# Altium PCB J1850_Tacho.PcbDoc
Units mm, origin at the board's own origin, x right, y up, seen from the top; angles counter-clockwise.
Board outline 100 x 100 mm, 2 copper layers (Top Layer, Bottom Layer); 54 components, 77 nets, 230 pads, 70 vias.
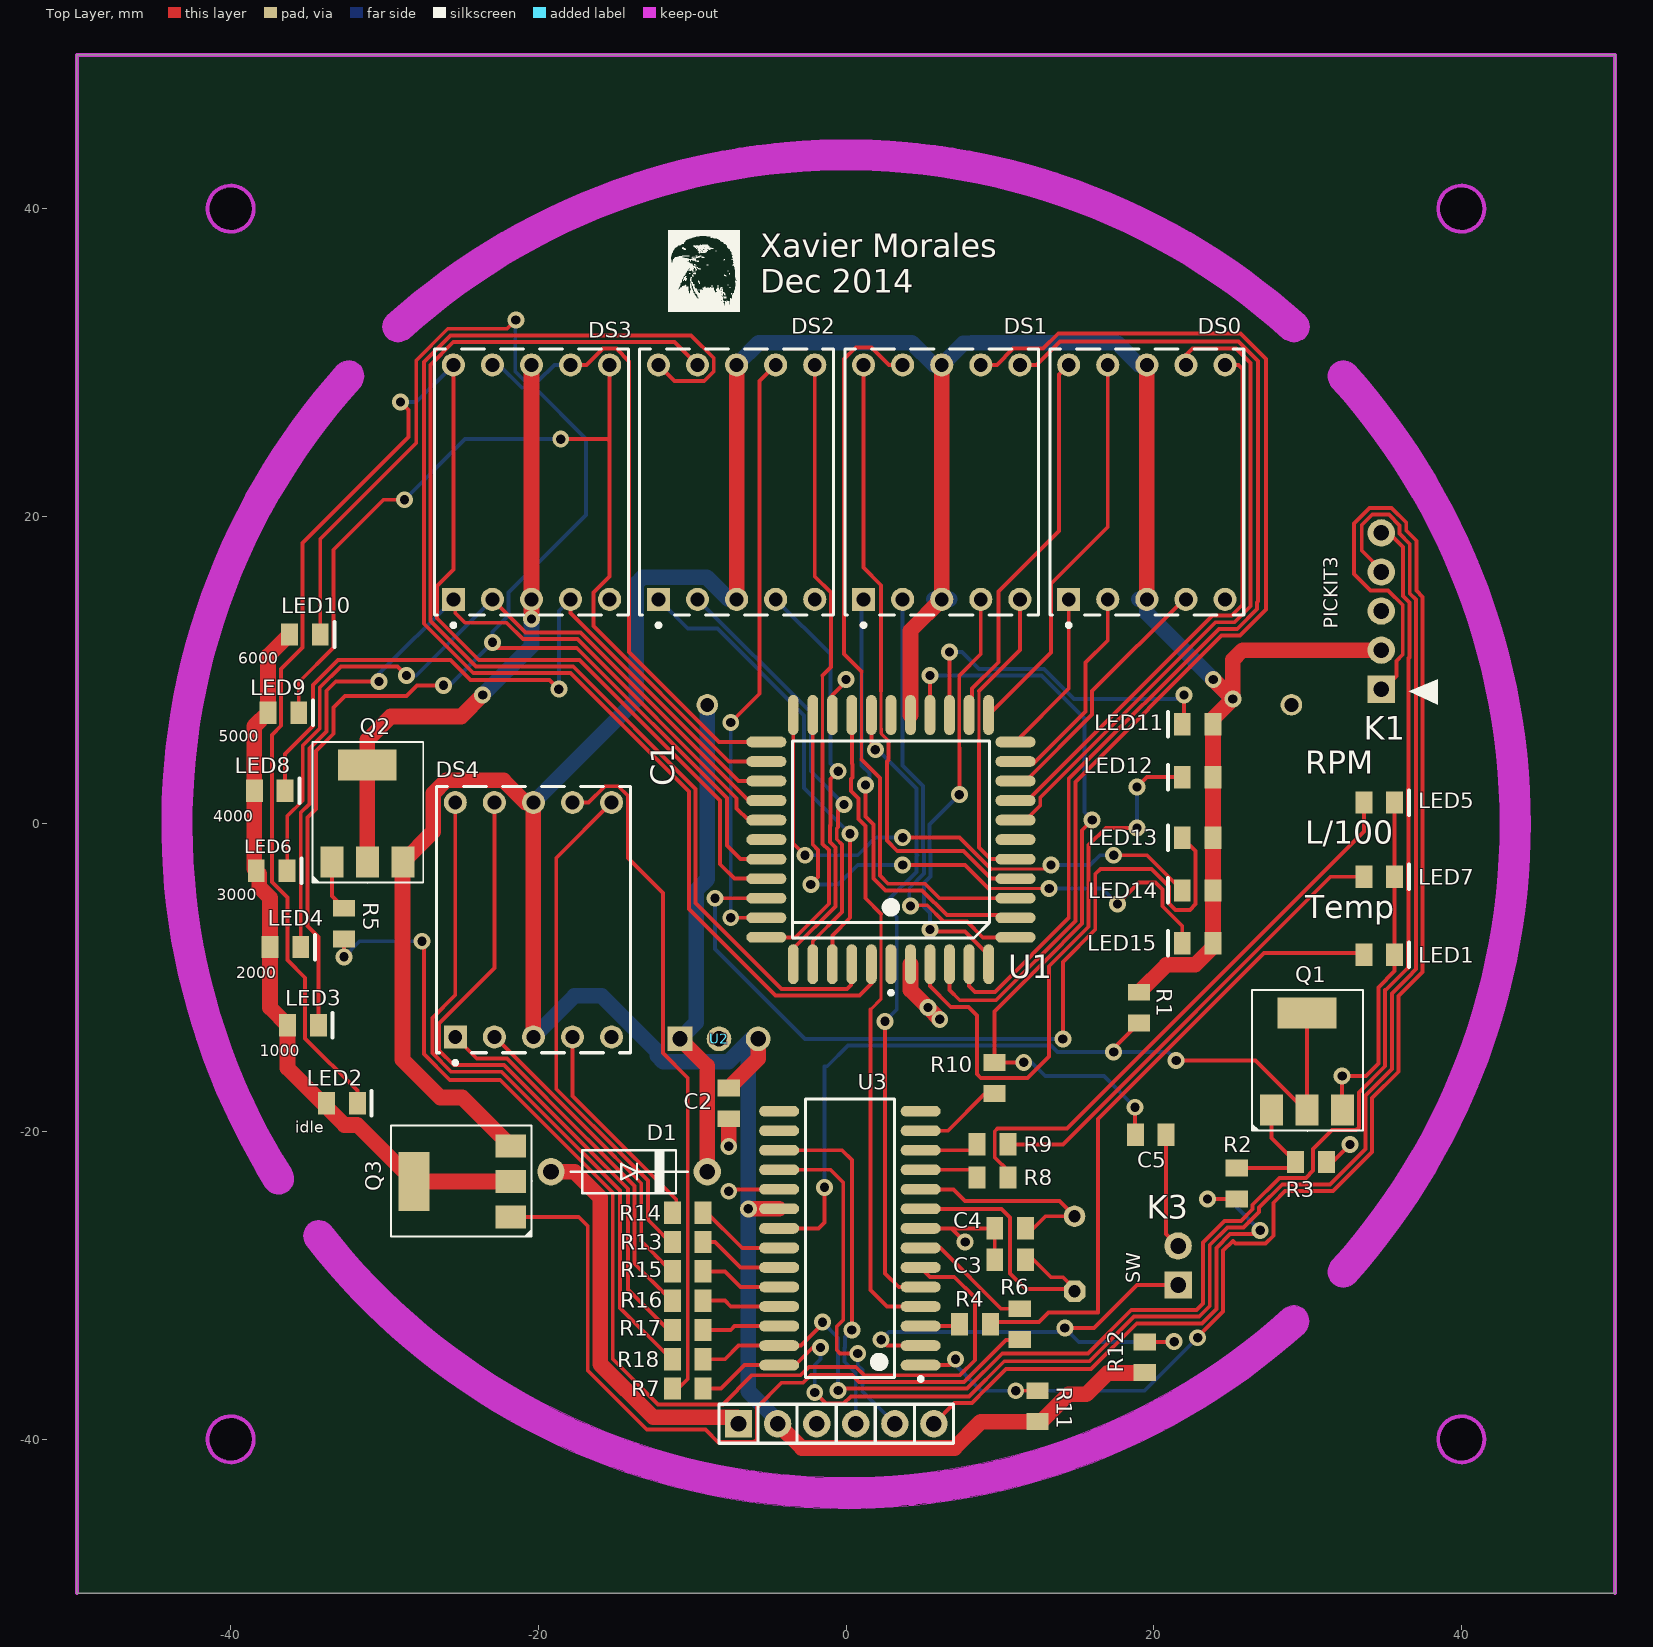
[diagram p0: Top Layer view]
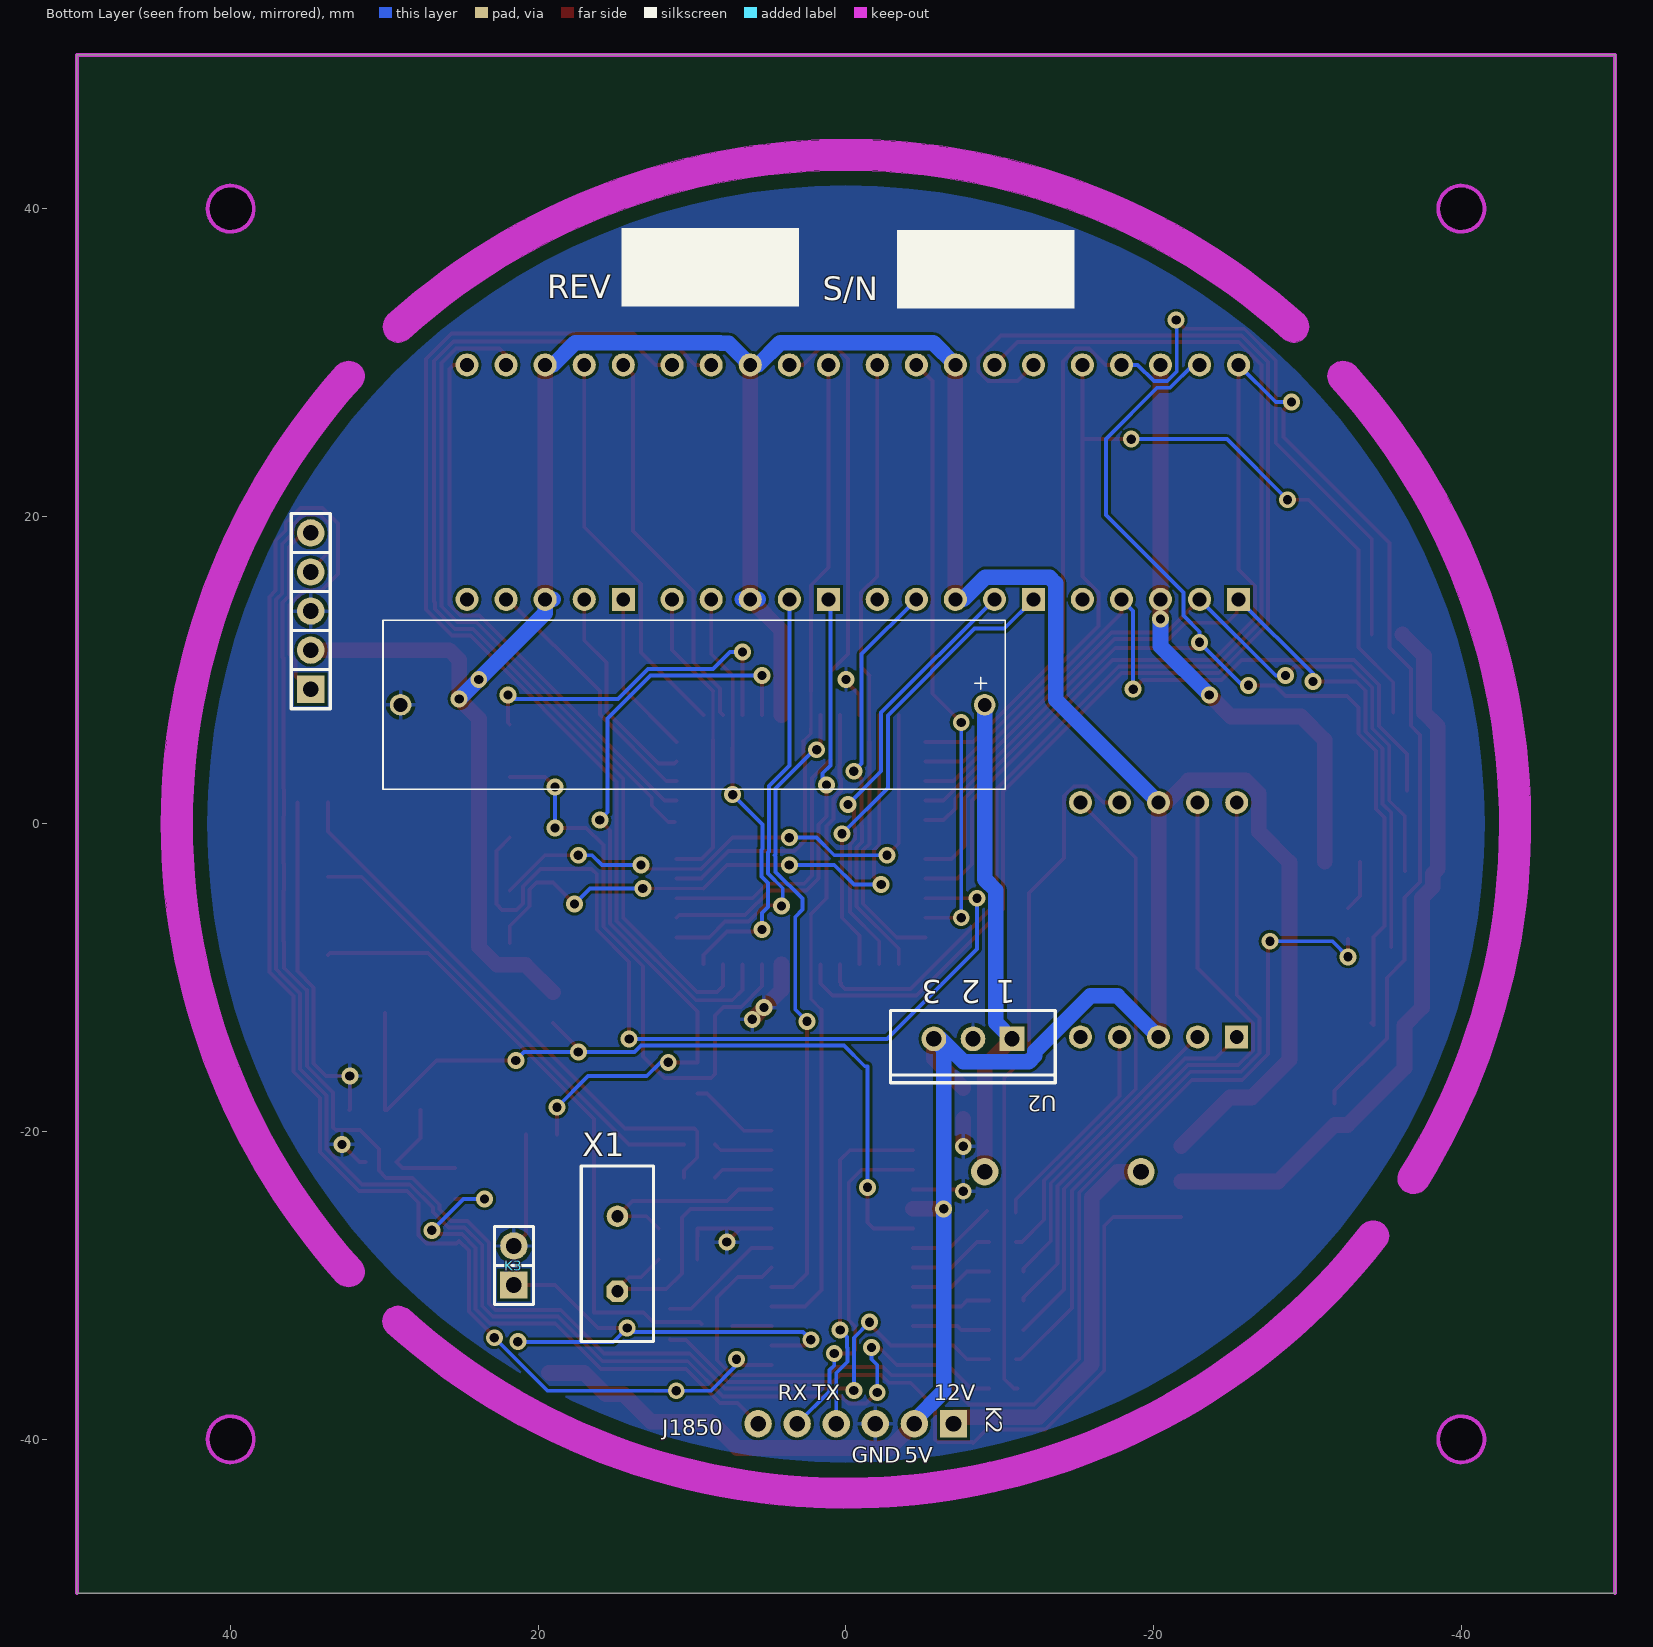
[diagram p1: Bottom Layer view, seen from below]
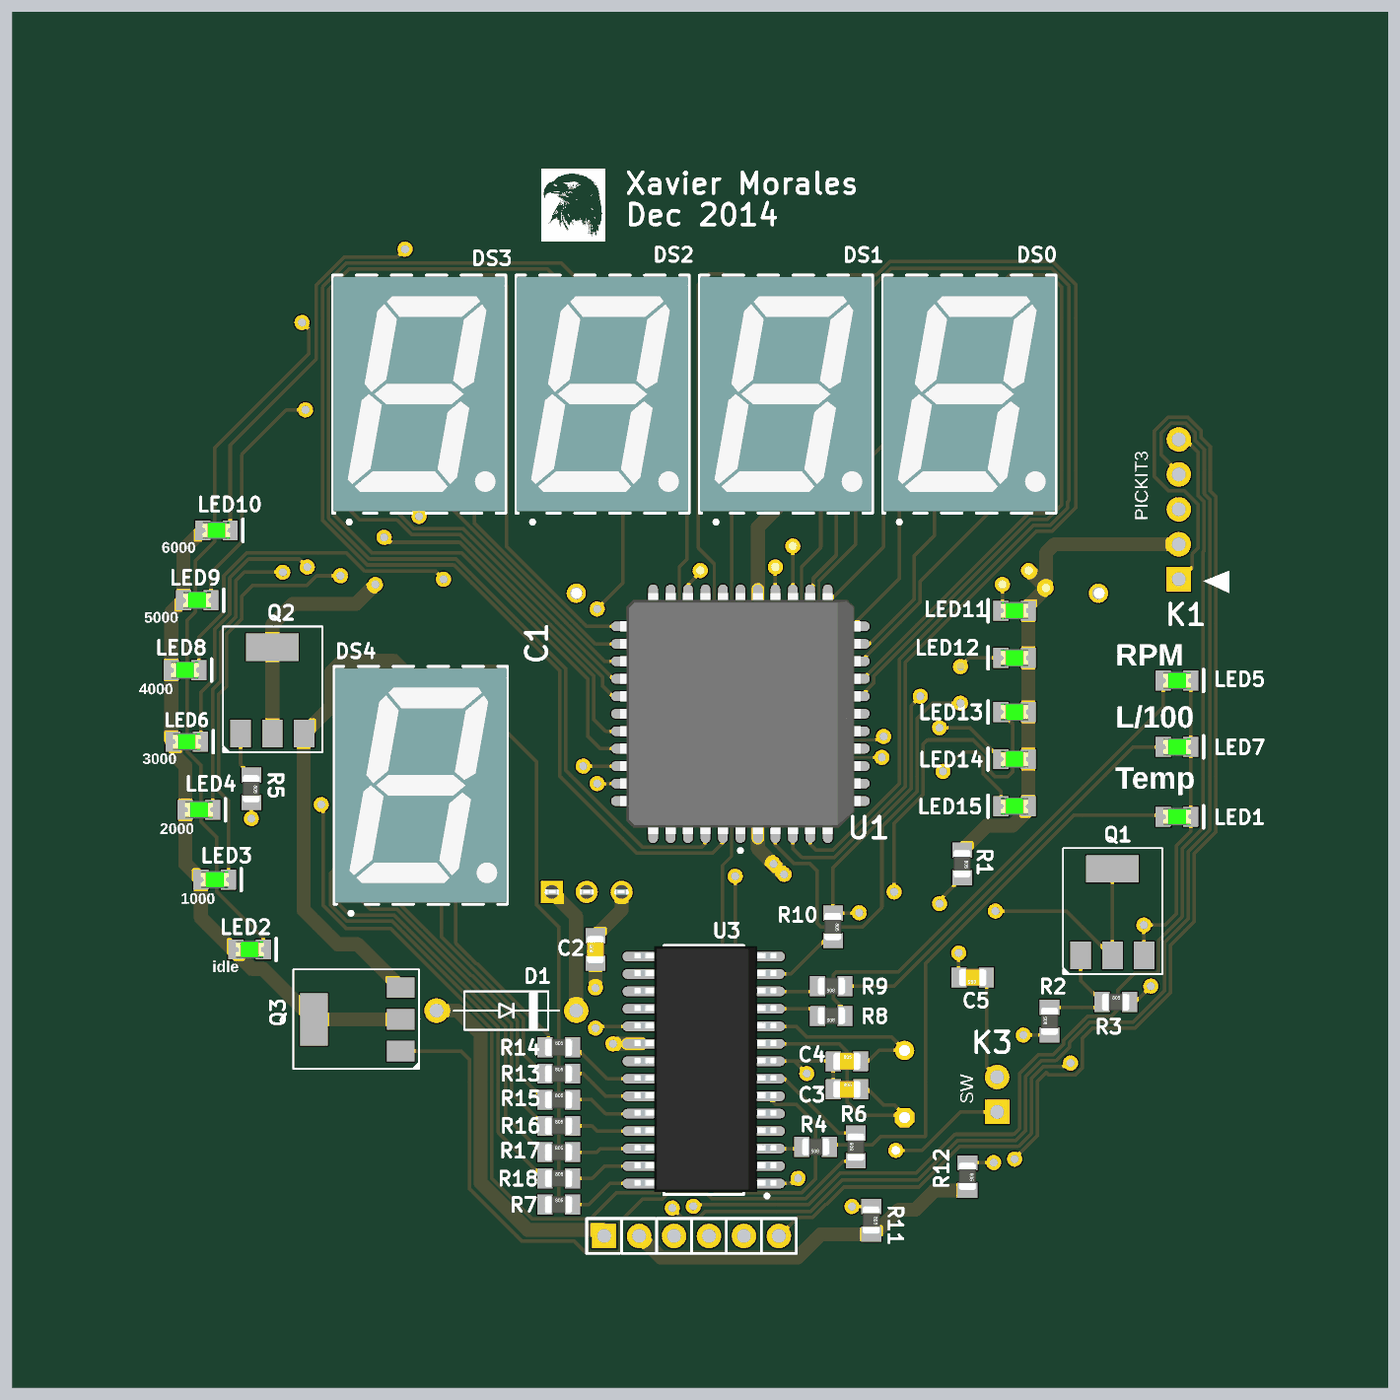
[diagram p2: 3D render of the assembled board from above, using the file's embedded part models]

## Layer stack, top to bottom
Top Solder: solder mask 0.0102, Solder Resist, Dk 3.5
Top Layer: signal copper 0.0356
Dielectric 1: dielectric 0.32, FR-4, Dk 4.8
Bottom Layer: signal copper 0.0356
Bottom Solder: solder mask 0.0102, Solder Resist, Dk 3.5

## Board outline
-50,-50 -50,50 50,50 50,-50
cut-out: -35.067,-27.397 ccw(c0,0) 29.777,-33.07 ccw(c29.107,-32.327) 30.108,-32.327 ccw(c29.107,-32.327) 28.438,-31.583 cw(c0,0) -33.49,-26.165 ccw(c-34.278,-26.781)
cut-out: -28.438,31.583 cw(c-29.107,32.327) -29.777,33.07 cw(c0,0) 29.777,33.07 cw(c29.107,32.327) 30.108,32.327 cw(c29.107,32.327) 28.438,31.583 ccw(c0,0)
cut-out: -37.738,-23.582 ccw(c-36.89,-23.051) -35.89,-23.051 ccw(c-36.89,-23.051) -36.042,-22.521 cw(c0,0) -31.583,28.438 ccw(c-32.327,29.107) -31.326,29.107 ccw(c-32.327,29.107) -33.07,29.777 ccw(c0,0)
cut-out: 31.583,-28.438 ccw(c32.327,-29.107) 33.07,-29.777 ccw(c0,0) 44.5,0 ccw(c0,0) 33.07,29.777 ccw(c32.327,29.107) 31.583,28.438 cw(c0,0) 42.5,0 cw(c0,0)
cut-out: -40,38.5 cw(c-40,40) -41.5,40 cw(c-40,40) -40,41.5 cw(c-40,40) -38.5,40 cw(c-40,40)
cut-out: 38.5,40 ccw(c40,40) 40,38.5 ccw(c40,40) 41.5,40 ccw(c40,40) 40,41.5 ccw(c40,40)
cut-out: 38.5,-40 ccw(c40,-40) 40,-41.5 ccw(c40,-40) 41.5,-40 ccw(c40,-40) 40,-38.5 ccw(c40,-40)
cut-out: -41.5,-40 ccw(c-40,-40) -40,-41.5 ccw(c-40,-40) -38.5,-40 ccw(c-40,-40) -40,-38.5 ccw(c-40,-40)

## Design rules (kind name [scope] priority, off if disabled: settings)
Clearance [All] p1: gap=0.178
HoleSize [All] p1: absolutevalues=TRUE maxlimit=6.35 minlimit=0.305 maxpercent=80.000 minpercent=20.000
MinimumSolderMaskSliver [All] p1: minsoldermaskwidth=0.203
PolygonConnect [All] p1: connectstyle=Relief reliefconductorwidth=0.254 reliefentries=4 polygonreliefangle="90 Angle" airgapwidth=0.254
RoutingVias [All] p1: holewidth=0.6 width=1.1 viastyle="Through Hole" minholewidth=0.6 minwidth=1.1 maxholewidth=0.6 maxwidth=1.1
SilkToSilkClearance [All] p1: silktosilkclearance=0.203
SilkToSolderMaskClearance [IsPad] p1: minsilkscreentomaskgap=0.178 clearancetoexposedcopper=TRUE
SolderMaskExpansion [All] p1: expansion=0.102
Width [All] p1 off: maxlimit=1.27 minlimit=0.152 preferedwidth=0.152 minimp=50.000000 maximp=50.000000 favimp=50.000000
25 further rules are at their usual default settings.

## Components (designator, comment, footprint, x,y, rotation, side; value= is the part's Value field where it differs from the comment)
C1 "1000 uF" "AXIAL CAP" 9.652,7.747 r180 top
C2 "1 uF" C_0805 -7.62,-18.161 r90 top
C3 "15 pF" C_0805 10.668,-28.321 r0 top
C4 "15 pF" C_0805 10.668,-26.289 r0 top
C5 "1000 pF" C_0805 19.812,-20.193 r180 top
D1 "1N4007" 1N400X -19.177,-22.606 r0 top
DS0 "SA56-51ZGWA" H-10 19.558,22.225 r0 top
DS1 "SA56-51ZGWA" H-10 6.223,22.225 r0 top
DS2 "SA56-51ZGWA" H-10 -7.112,22.225 r0 top
DS3 "SA56-51ZGWA" H-10 -20.447,22.225 r0 top
DS4 "SA56-51ZGWA" H-10 -20.32,-6.223 r0 top
K1 "HEADER-1X5" HEADER-1X5 34.798,8.763 r180 top
K2 "HEADER-1X6" HEADER-1X6 -6.985,-38.989 r270 bottom
K3 "HEADER-1X2" HEADER-1X2 21.59,-29.972 r0 bottom
LED1 "YELLOW" LED_0805 34.671,-8.509 r180 top
LED2 "YELLOW" LED_0805 -32.766,-18.161 r180 top
LED3 "GREEN" LED_0805 -35.306,-13.081 r180 top
LED4 "GREEN" LED_0805 -36.449,-8.001 r180 top
LED5 "YELLOW" LED_0805 34.671,1.397 r180 top
LED6 "GREEN" LED_0805 -37.338,-3.048 r180 top
LED7 "YELLOW" LED_0805 34.671,-3.429 r180 top
LED8 "YELLOW" LED_0805 -37.465,2.159 r180 top
LED9 "YELLOW" LED_0805 -36.576,7.239 r180 top
LED10 "RED" LED_0805 -35.179,12.319 r180 top
LED11 "GREEN" LED_0805 22.86,6.477 r0 top
LED12 "GREEN" LED_0805 22.86,3.048 r0 top
LED13 "GREEN" LED_0805 22.86,-0.889 r0 top
LED14 "YELLOW" LED_0805 22.86,-4.318 r0 top
LED15 "RED" LED_0805 22.86,-7.747 r0 top
Q1 "NPN PZT3904" SOT223 29.972,-15.875 r0 top
Q2 "PNP PZT3906" SOT223 -31.115,0.254 r0 top
Q3 "PNP PZT3906" SOT223 -24.511,-23.241 r90 top
R1 "47 kOhm" R_0805 19.05,-11.938 r270 top
R2 "47 kOhm" R_0805 25.4,-23.368 r90 top
R3 "10 kOhm" R_0805 30.226,-21.971 r0 top
R4 "220 Ohm" R_0805 8.382,-32.512 r180 top
R5 "1 kOhm" R_0805 -32.639,-6.477 r270 top
R6 "1 kOhm" R_0805 11.303,-32.512 r90 top
R7 "220 Ohm" R_0805 -10.287,-36.703 r0 top
R8 "220 Ohm" R_0805 9.525,-22.987 r180 top
R9 "220 Ohm" R_0805 9.525,-20.828 r180 top
R10 "1200 Ohm" R_0805 9.652,-16.51 r270 top
R11 "10 kOhm" R_0805 12.446,-37.846 r270 top
R12 "10 kOhm" R_0805 19.431,-34.671 r270 top
R13 "220 Ohm" R_0805 -10.287,-27.178 r0 top
R14 "220 Ohm" R_0805 -10.287,-25.273 r0 top
R15 "220 Ohm" R_0805 -10.287,-29.083 r0 top
R16 "220 Ohm" R_0805 -10.287,-30.988 r0 top
R17 "220 Ohm" R_0805 -10.287,-32.893 r0 top
R18 "220 Ohm" R_0805 -10.287,-34.798 r0 top
U1 "MM5450YV TR" PLCC-L44_M 2.921,-1.016 r180 top
U2 "LM340T-5.0NOPB" TO-220-3 -8.255,-13.97 r180 top
U3 "PIC18F2553-I/SO" SOIC-SO28_M 0.254,-26.924 r180 top
X1 "20 MHz" "XTAL - HC-49U" 14.859,-27.94 r90 bottom

## Footprints (in the part's own frame and the unit in brackets; to place one, negate y for a bottom-side part, rotate by r counter-clockwise, add the part's x,y. Pads: shape width x height; smd on the part's side, far side on the other; paste and mask are expansions set on the pad)
1N400X [mil]
  round 70 hole 40: A(0,0) K(400,0)
  silkscreen extent 50,-55 350,55, body extent -14,-56 416,56, height 116
"AXIAL CAP" [mm]
  round 1.4 hole 0.9: 1(18.669,0) 2(-19.304,0)
  body extent -19.75,-5.5 19.05,5.5, height 12.5
C_0805 [mm] "Chip Capacitor, 2-Leads, Body 2,0x1,3mm, IPC Medium Density"
  rect 1.1x1.45 smd: 1(-1,0) 2(1,0)
  body extent -1,-0.62 1,0.63, height 0.78
H-10 [mm] "LED, 7-Segment Display, 14.22 mm, RHD; 10 Leads; Row Space 15.24 mm; Pitch 2.54 mm"
  rect 1.5x1.5 hole 0.9: 1(-5.08,-7.62)
  round 1.5 hole 0.9: 2(-2.54,-7.62) 3(0,-7.62) 4(2.54,-7.62) 5(5.08,-7.62) 6(5.08,7.62) 7(2.54,7.62) 8(0,7.62) 9(-2.54,7.62) 10(-5.08,7.62)
  silkscreen extent -6.3,-9.42 6.3,8.65, body extent -6.25,-8.51 6.25,8.51, height 7.62
HEADER-1X2 [mil]
  rect 70x70 hole 40: 1(0,0)
  round 70 hole 40: 2(0,-100)
  silkscreen extent -50,-150 50,50, body extent -50,-150 50,50, height 470
HEADER-1X5 [mil]
  rect 70x70 hole 40: 1(0,0)
  round 70 hole 40: 2(0,-100) 3(0,-200) 4(0,-300) 5(0,-400)
  body extent -50,-450 50,50, height 470
HEADER-1X6 [mil]
  rect 70x70 hole 40: 1(0,0)
  round 70 hole 40: 2(0,-100) 3(0,-200) 4(0,-300) 5(0,-400) 6(0,-500)
  body extent -50,-550 50,50, height 470
LED_0805 [mm] "Chip Capacitor, 2-Leads, Body 2,0x1,3mm, IPC Medium Density"
  rect 1.1x1.45 smd: 1(-1,0) 2(1,0)
  silkscreen extent -1.93,-0.8 -1.93,0.8, body extent -1.01,-0.62 1.01,0.63, height 1.1
PLCC-L44_M [mm] "Leaded Chip Carrier, 44-Leads, Body 16.6x16.6mm, Pitch 1.27mm, IPC Low Density"
  oval 0.7x2.6 smd: 1(0,8.1) 2(-1.27,8.1) 3(-2.54,8.1) 4(-3.81,8.1) 5(-5.08,8.1) 6(-6.35,8.1) 18(-6.35,-8.1) 19(-5.08,-8.1) 20(-3.81,-8.1) 21(-2.54,-8.1) 22(-1.27,-8.1) 23(0,-8.1) 24(1.27,-8.1) 25(2.54,-8.1) 26(3.81,-8.1) 27(5.08,-8.1) 28(6.35,-8.1) 40(6.35,8.1) 41(5.08,8.1) 42(3.81,8.1) 43(2.54,8.1) 44(1.27,8.1)
  oval 2.6x0.7 smd: 7(-8.1,6.35) 8(-8.1,5.08) 9(-8.1,3.81) 10(-8.1,2.54) 11(-8.1,1.27) 12(-8.1,0) 13(-8.1,-1.27) 14(-8.1,-2.54) 15(-8.1,-3.81) 16(-8.1,-5.08) 17(-8.1,-6.35) 29(8.1,-6.35) 30(8.1,-5.08) 31(8.1,-3.81) 32(8.1,-2.54) 33(8.1,-1.27) 34(8.1,0) 35(8.1,1.27) 36(8.1,2.54) 37(8.1,3.81) 38(8.1,5.08) 39(8.1,6.35)
  silkscreen extent -6.4,-6.4 6.4,10.07, body extent -8.76,-8.76 8.76,8.76, height 4.39
R_0805 [mm] "Chip Resistor Body 2,0x1,3mm, IPC Medium Density"
  rect 1.1x1.45 smd: 1(-1,0) 2(1,0)
  body extent -1.02,-0.63 0.98,0.62, height 0.78
SOIC-SO28_M [mm] "SOIC, 28-Leads, Body 17.9x7.5mm, Pitch 1.27mm, IPC Low Density"
  oval 2.6x0.7 smd: 1(-4.6,8.255) 2(-4.6,6.985) 3(-4.6,5.715) 4(-4.6,4.445) 5(-4.6,3.175) 6(-4.6,1.905) 7(-4.6,0.635) 8(-4.6,-0.635) 9(-4.6,-1.905) 10(-4.6,-3.175) 11(-4.6,-4.445) 12(-4.6,-5.715) 13(-4.6,-6.985) 14(-4.6,-8.255) 15(4.6,-8.255) 16(4.6,-6.985) 17(4.6,-5.715) 18(4.6,-4.445) 19(4.6,-3.175) 20(4.6,-1.905) 21(4.6,-0.635) 22(4.6,0.635) 23(4.6,1.905) 24(4.6,3.175) 25(4.6,4.445) 26(4.6,5.715) 27(4.6,6.985) 28(4.6,8.255)
  silkscreen extent -4.72,-9.05 2.9,9.28, body extent -5.28,-9.02 5.02,8.88, height 2.72
SOT223 [mil]
  rect 59x79 smd: B(-91,-107) C(0,-107) E(91,-107)
  rect 150x79 smd: C(0,141)
  silkscreen extent -141,-161 143,200, body extent -131,-105 135,162, height 51
TO-220-3 [mm] "TO, Thru-Hole, Vertical, Heatsink Mounted; 3 In-Line Leads; Pitch 2.54 mm"
  rect 1.6x1.6 hole 1: 1(2.54,0)
  round 1.6 hole 1: 2(0,0) 3(-2.54,0)
  body extent -5.05,-1.8 5.05,2.8, height 18.5
"XTAL - HC-49U" [mm] "Quartz Crystal, Thru-Hole; 2 Leads; Body 11.35 x 4.65 x 13.46 mm (LxWxH max)"
  oct 1.4x1.4 hole 0.8: 1(-2.44,0)
  round 1.4 hole 0.8: 2(2.44,0)
  silkscreen extent -5.7,-2.35 5.7,2.35, body extent -5.75,-2.54 5.75,2.46, height 14.23

## Part data
C1: library part "AXIAL CAP", "AXIAL CAPACITOR"
C2 C3 C4 C5: library part "Capacitor SMD 0805", "Capacitor SMD 0805"
D1: library part 1N4001, "1N4001"
DS0: library part 7Segment, "14.22 mm Low Current HER 7-Segment Display: CA, RH DP"
DS1 DS2 DS3 DS4: library part HDSP-5551, "14.22 mm Low Current HER 7-Segment Display: CA, RH DP"
K1: "PINHEADER 1X5"
LED1 LED2 LED3 LED4 LED5 LED6 LED7 LED8 LED9 LED10 LED11 LED12 LED13 LED14 LED15: library part "LED SMD 0805", "LED SMD 0805"
Q1: library part "NPN TRANSISTOR", "NPN TRANSISTOR"
Q2 Q3: library part "PNP TRANSISTOR", "PNP TRANSISTOR"
R1 R2 R3 R4 R5 R6 R7 R8 R9 R10 R11 R12 R13 R14 R15 R16 R17 R18: library part "Resistor SMD 0805", "Resistor SMD 0805"
U1: "IC DRIVER DISPLAY LED 44PLCC"
U2: "IC REG LDO  5V 1A TO220-3"
U3: "High Performance, Enhanced Flash, USB Microcontroller with 12-Bit A/D and nanoWatt Technology, 32K Flash, 28-Pin SOIC, Industrial Temperature Range"
X1: library part XTAL

## Via types
v1: diameter 1.1, hole 0.6, Top Layer to Bottom Layer, 70 vias

## Nets (pads, with @x,y where several pads share a name; then routed paths per layer and width w, separated by ;. In a path a pad name is that pad's centre, name@x,y a point inside that pad or via, vN(x,y) a via of type N, cw(c..) or ccw(c..) an arc to the next point about the centre after c; other vN are vias at no path point)
5V: C2.2 DS0.3 DS0.8 DS1.3 DS1.8 DS2.3 DS2.8 DS4.3 DS4.8 K1.2 K2.2 LED11.2 LED12.2 LED13.2 LED14.2 LED15.2 Q2.E Q3.E R1.1 R11.2 R12.2 U1.22 U2.3 U3.20 | length 282
  Top Layer w0.254: DS2.8 DS2.8@-7.112,29.947 ; DS1.8 DS1.8@6.223,29.972
  Top Layer w1.016: Q3.E -24.943,-17.78 -26.375,-17.78 -28.833,-15.322 -28.833,-2.493 Q2.E -26.836,-0.496 -26.836,1.992 -25.995,2.833 -22.265,2.833 -20.829,1.397 DS4.8 DS4.3 ; C2.2 -5.715,-15.256 U2.3 ; DS2.3 DS2.8 ; v1(-6.35,-25.019) U3.20 ; K2.2 -2.87,-40.564 6.841,-40.564 7.061,-40.564 8.763,-38.862 12.675,-38.862 14.453,-37.084 15.621,-37.084 17.018,-35.687 19.288,-35.687 R12.2@19.304,-35.671 ; U1.22 4.191,12.573 DS1.3 DS1.8 ; R1.1 20.83,-9.158 22.694,-9.158 23.86,-7.992 23.86,6.842 v1(25.146,8.128) ; DS0.3 DS0.8 ; v1@23.86,9.382 23.892,9.382 v1(25.146,8.128) ; K1.2@34.925,11.303 25.781,11.303 25.146,10.668 v1(25.146,8.128)
  Bottom Layer w1.016: DS4.3 -17.653,-11.176 -15.876,-11.176 -12.281,-14.772 -12.281,-15.054 -11.879,-15.456 -7.64,-15.456 -6.154,-13.97 U2.3 -6.35,-14.605 v1(-6.35,-25.019) -6.35,-36.876 -4.445,-38.781 K2.2 ; DS4.8 -13.628,8.089 -13.628,15.639 -13.226,16.041 -9.057,16.041 -7.621,14.605 DS2.3 ; DS2.8 -5.676,31.281 4.278,31.281 5.714,29.845 DS1.8 7.62,31.242 8.129,31.242 8.168,31.281 17.613,31.281 19.049,29.845 DS0.8 ; DS1.3@5.714,14.605 DS1.3 DS1.3@6.732,14.605 ; DS0.3@19.049,14.605 DS0.3 19.558,13.716 v1(23.876,9.398) v1(25.146,8.128)
BRIGHNESS: C5.2 R10.1 U1.21 | length 51.3
  Top Layer w0.254: U1.21 v1(5.461,9.652) ; v1@11.557,-15.51 R10.1 9.652,-12.192 12.827,-9.017 12.827,-8.993 15.342,-6.478 15.342,-0.406 v1(16.002,0.254) ; C5.2@18.796,-20.177 v1(18.796,-18.415)
  Bottom Layer w0.254: v1(5.461,9.652) 12.7,9.652 15.494,6.858 15.494,0.762 v1(16.002,0.254) ; v1(11.557,-15.494) 12.065,-15.494 12.954,-16.383 16.764,-16.383 v1(18.796,-18.415) v1@18.796,-18.669
CLOCK_MICREL: U1.24 U3.5 | length 41.5
  Top Layer w0.254: U1.24 1.651,5.221 v1@1.905,4.967 ; v1(2.54,-12.827) 2.54,-29.21 3.429,-30.099 U3.5
  Bottom Layer w0.254: v1@1.905,4.967 4.572,2.3 4.572,-1.966 4.638,-2.032 4.572,-2.098 4.572,-3.109 2.828,-4.853 2.828,-5.561 3.302,-6.035 3.302,-12.065 v1(2.54,-12.827)
  other v1: 1.905,4.826
D3-3: DS3.3 DS3.8 Q2.C | length 39.5
  Top Layer w1.016: Q2.C@-31.115,-2.464 -31.115,3.835 -31.115,5.461 -29.591,6.985 -25.019,6.985 v1(-23.622,8.382) ; v1(-20.447,13.335) DS3.3 DS3.8
  Bottom Layer w0.254: DS3.3 DS3.3@-20.32,14.605
  Bottom Layer w1.016: v1(-23.622,8.382) -20.447,11.557 v1(-20.447,13.335)
DATA_MICREL: U1.25 U3.4 | length 42.2
  Top Layer w0.203: 1.6,-12.057 2.286,-11.371 2.286,-5.842
  Top Layer w0.254: U1.25 0.381,3.937 0.432,3.886 0.432,3.031 0.33,2.929 0.33,2.142 0.813,1.659 0.813,0.33 1.27,-0.127 1.27,-4.826 2.286,-5.842 ; 1.6,-12.057 1.6,-30.302 2.667,-31.369 U3.4
DIGIT0_1: DS0.1 U1.17 | length 10.7
  Top Layer w0.254: U1.17 14.478,8.791 DS0.1
DIGIT0_2: DS0.2 U1.16 | length 13.9
  Top Layer w0.254: U1.16 11.148,3.937 12.192,3.937 15.57,7.315 15.57,10.49 17.018,11.938 DS0.2
DIGIT0_4: DS0.4 U1.15 | length 16.9
  Top Layer w0.254: U1.15 11.684,2.794 16.002,7.112 16.002,8.636 21.971,14.605 DS0.4
DIGIT0_6: DS0.6 U1.14 | length 36.6
  Top Layer w0.254: U1.14 11.811,1.524 23.837,13.55 25.075,13.55 25.781,14.256 25.781,29.591 25.527,29.845 DS0.6
DIGIT0_7: DS0.7 U1.13 | length 42.5
  Top Layer w0.254: U1.13@11.148,0.127 11.557,0.127 12.626,1.196 12.626,1.728 24.016,13.118 25.254,13.118 26.289,14.154 26.289,29.972 25.361,30.9 22.518,30.9 22.098,30.48 DS0.7
DIGIT0_9: DS0.9 U1.18 | length 26
  Top Layer w0.254: U1.18 13.335,11.148 13.335,15.621 17.018,19.304 DS0.9
DIGIT0_10: DS0.10 U1.19 | length 25.4
  Top Layer w0.254: U1.19 8.204,7.287 8.204,8.815 9.906,10.517 9.906,15.113 13.843,19.05 13.843,29.21 DS0.10
DIGIT1_1: DS1.1 U1.8 | length 29
  Top Layer w0.254: v1(1.27,2.54) 1.27,0.484 1.778,-0.024 1.778,-3.532 2.564,-4.318 4.953,-4.318 6.553,-5.918 10.843,-5.918 U1.8
  Bottom Layer w0.254: DS1.1 1.016,14.478 1.016,3.81 1.524,3.302 1.524,2.794 v1(1.27,2.54)
DIGIT1_2: DS1.2 U1.7 | length 28.7
  Top Layer w0.254: v1(4.191,-5.334) 4.242,-5.283 5.283,-5.283 6.35,-6.35 7.874,-6.35 8.89,-7.366 U1.7
  Bottom Layer w0.254: DS1.2 3.683,3.799 5.004,2.479 5.004,-1.787 5.07,-1.853 5.07,-3.222 4.115,-4.177 4.115,-5.258 v1(4.191,-5.334)
DIGIT1_4: DS1.4 U1.6 | length 28.3
  Top Layer w0.203: 7.366,4.953 7.366,9.652
  Top Layer w0.254: v1(5.461,-6.858) 5.588,-6.985 7.747,-6.985 9.271,-8.51 U1.6 ; v1(7.366,1.905) 7.366,4.953 ; 7.366,9.652 8.763,11.049 DS1.4
  Bottom Layer w0.254: v1(5.461,-6.858) 5.461,-5.776 5.08,-5.395 5.08,-3.822 5.501,-3.401 5.501,-1.674 5.436,-1.608 5.436,-0.025 v1(7.366,1.905)
DIGIT1_5: DS1.5 U1.11 | length 19.9
  Top Layer w0.203: 8.636,5.461 8.636,8.636
  Top Layer w0.254: 8.636,5.461 8.636,-1.524 9.398,-2.286 U1.11 ; 8.636,8.636 11.303,11.303 DS1.5
DIGIT1_6: DS1.6 U1.5 | length 68.7
  Top Layer w0.254: U1.5 8.001,-10.541 8.382,-10.922 9.676,-10.922 14.478,-6.12 14.478,2.921 24.244,12.687 25.433,12.687 26.721,13.975 26.721,14.402 26.797,14.478 26.797,30.099 25.527,31.369 13.9,31.369 12.376,29.845 DS1.6
DIGIT1_7: DS1.7 U1.4 | length 74.7
  Top Layer w0.254: U1.4 6.731,-10.795 7.393,-11.457 9.752,-11.457 14.91,-6.299 14.91,2.742 24.422,12.255 25.611,12.255 27.305,13.948 27.305,30.226 25.654,31.877 13.797,31.877 12.82,30.9 10.866,30.9 9.811,29.845 DS1.7
DIGIT1_9: DS1.9 U1.9 | length 48.6
  Top Layer w0.203: 1.016,4.191 1.016,9.906
  Top Layer w0.254: 1.016,4.191 2.21,2.997 2.21,-3.353 2.743,-3.886 5.132,-3.886 6.072,-4.826 U1.9 ; 1.016,9.906 -0.127,11.049 -0.127,30.226 0.635,30.988 1.651,30.988 2.794,29.845 DS1.9
DIGIT1_10: DS1.10 U1.10 | length 41
  Top Layer w0.203: 2.286,8.636 2.286,6.223 2.292,6.217 2.292,5.873 2.794,5.371
  Top Layer w0.254: DS1.10 1.143,16.664 2.286,15.521 2.286,8.636 ; 2.794,5.371 2.76,5.337 2.76,4.157 2.667,4.064 2.667,-1.082 3.329,-1.744 7.634,-1.744 9.398,-3.507 ; 9.398,-3.556 U1.10
DIGIT2_1: DS2.1 U1.42 | length 30.4
  Top Layer w0.254: U1.42 -0.889,-7.239 0.254,-6.096 v1(0.254,-0.635)
  Bottom Layer w0.254: DS2.1 -10.287,12.7 -8.358,12.7 -2.718,7.06 -2.718,2.337 v1@0.191,-0.572
DIGIT2_2: DS2.2 U1.41 | length 29.4
  Top Layer w0.254: U1.41 -2.159,-7.62 -0.254,-5.715 -0.254,-1.336 -0.601,-0.989 -0.601,-0.281 -0.508,-0.188 -0.508,0.889 v1(-0.127,1.27)
  Bottom Layer w0.254: DS2.2@-10.261,14.605 DS2.2 -2.286,7.239 -2.286,3.429 v1(-0.127,1.27)
DIGIT2_4: DS2.4 U1.40 | length 26.9
  Top Layer w0.254: U1.40 -3.429,-8.104 -0.686,-5.36 -0.686,-1.515 -1.033,-1.168 -1.033,-0.102 -1.016,-0.085 -1.016,2.921 v1(-0.508,3.429)
  Bottom Layer w0.254: DS2.4 -1.016,11.049 -1.016,3.937 v1(-0.508,3.429)
DIGIT2_6: DS2.6 U1.39 | length 40.8
  Top Layer w0.203: -1.524,5.334 -1.524,9.652
  Top Layer w0.254: U1.39 -3.302,-7.366 -1.118,-5.182 -1.118,-1.694 -1.524,-1.287 -1.524,5.334 ; DS2.6 -2.032,16.097 -0.977,15.042 -0.977,10.199 -1.524,9.652
DIGIT2_7: DS2.7 U1.38 | length 39.5
  Top Layer w0.254: v1(-7.493,-6.096) U1.38 ; v1(-7.493,6.604) -5.627,8.47 -5.627,28.79 DS2.7
  Bottom Layer w0.254: v1(-7.493,-6.096) v1(-7.493,6.604)
DIGIT2_9: DS2.9 U1.43 | length 78.3
  Top Layer w0.254: DS2.9 -11.139,31.332 -25.532,31.332 -27.014,29.85 -27.014,13.195 -24.055,10.236 -17.729,10.236 -9.779,2.286 -9.779,-5.139 -4.197,-10.721 0.074,-10.721 0.331,-10.464 0.331,-10.337 0.381,-10.287 U1.43
DIGIT2_10: DS2.10 U1.44 | length 87.5
  Top Layer w0.254: DS2.10 -11.137,28.79 -9.215,28.79 -8.597,29.408 -8.597,30.282 -10.079,31.763 -25.711,31.763 -27.445,30.029 -27.445,13.016 -24.234,9.804 -17.908,9.804 -10.211,2.107 -10.211,-5.537 -4.595,-11.153 0.866,-11.153 1.651,-10.367 U1.44
DIGIT3_1: DS3.1 LED4.1 U1.33 | length 55.5
  Top Layer w0.254: LED4.1 -35.449,0.746 -34.886,1.309 -34.886,4.913 -33.782,6.018 -33.782,8.661 -33.172,9.271 v1(-30.353,9.271) ; DS3.1 -25.4,14.478 -25.4,13.716 -24.765,13.081 -22.074,13.081 -21.007,12.014 -17.451,12.014 -7.112,1.675 -7.112,1.016 -6.35,0.254 U1.33
  Bottom Layer w0.254: v1(-30.353,9.271) -30.353,9.779 DS3.1
DIGIT3_2: DS3.2 LED6.1 U1.32 | length 50.1
  Top Layer w0.254: LED6.1 -36.322,-3.032 -36.322,0.508 -35.318,1.512 -35.318,5.092 -34.214,6.197 -34.214,8.864 -32.841,10.236 -29.159,10.236 v1(-28.575,9.652) ; DS3.2 -20.828,12.446 -17.272,12.446 -6.35,1.524 U1.32
  Bottom Layer w0.254: v1(-28.575,9.652) -27.94,9.652 DS3.2
DIGIT3_4: DS3.4 LED8.1 U1.31 | length 49.4
  Top Layer w0.254: LED8.1 -36.465,4.556 -34.646,6.375 -34.646,9.042 -33.02,10.668 -25.708,10.668 -24.413,9.373 -19.279,9.373 v1(-18.669,8.763) ; DS3.4 -17.907,13.716 -6.985,2.794 U1.31
  Bottom Layer w0.254: v1(-18.669,8.763) -18.669,13.843 DS3.4
DIGIT3_6: DS3.6 LED9.1 U1.30 | length 64.8
  Top Layer w0.254: LED9.1 -35.576,9.216 -33.324,11.468 -33.324,17.83 -30.072,21.082 v1(-28.702,21.082) ; v1(-18.542,25.019) -15.494,25.019 -15.367,24.892 ; DS3.6 -15.367,24.892 ; U1.30 -7.62,4.064 -16.422,12.866 -16.422,15.042 -15.367,16.097 -15.367,24.892
  Bottom Layer w0.254: v1(-28.702,21.082) -24.765,25.019 v1(-18.542,25.019)
DIGIT3_7: DS3.7 LED10.1 U1.29 | length 70.4
  Top Layer w0.254: LED10.1 -34.179,18.526 -27.94,24.765 -27.94,30.145 -25.89,32.195 -22.034,32.195 v1(-21.463,32.766) ; DS3.7 -16.859,29.845 -15.804,30.9 -14.93,30.9 -14.097,30.067 -14.097,11.176 -8.255,5.334 U1.29
  Bottom Layer w0.254: v1@-21.502,32.766 -21.502,29.408 -20.884,28.79 -20.01,28.79 -18.955,29.845 DS3.7
DIGIT3_9: DS3.9 LED3.1 U1.35 | length 83.2
  Top Layer w0.254: LED3.1@-34.163,-12.938 LED3.1 -34.306,-7.35 -35.017,-6.639 -35.017,0.416 -34.454,0.979 -34.454,4.736 -33.325,5.864 -33.325,7.569 -32.563,8.331 -28.567,8.331 -27.881,9.017 v1(-26.162,9.017) ; v1(-22.987,11.811) -22.63,11.454 -17.502,11.454 -7.747,1.7 -7.747,-1.397 -6.858,-2.286 U1.35
  Bottom Layer w0.254: v1(-26.162,9.017) -25.781,9.017 v1(-22.987,11.811) -22.987,12.495 -21.932,13.55 -21.932,15.042 -16.891,20.083 -16.891,25.019 -20.23,28.358 -21.063,28.358 -22.549,29.845 DS3.9
DIGIT3_10: DS3.10 LED2.1 U1.36 | length 104
  Top Layer w0.254: LED2.1 -31.766,-17.327 -35.161,-13.932 -35.161,-9.995 -36.304,-8.852 -36.304,-4.788 -37.32,-3.772 -37.32,5.789 -36.721,6.388 -36.721,10.071 -35.324,11.468 -35.324,18.27 -28.448,25.146 -28.448,26.924 v1(-28.956,27.432) ; DS3.10 -25.527,16.536 -26.582,15.481 -26.582,13.374 -23.876,10.668 -17.326,10.668 -8.179,1.521 -8.179,-2.616 -7.239,-3.556 U1.36
  Bottom Layer w0.254: v1(-28.956,27.432) -27.94,27.432 DS3.10
GEAR_A_7: K1.4 R7.2 U3.28 | length 106.6
  Top Layer w0.254: R7.2 -8.128,-36.703 -6.604,-35.179 U3.28 -3.302,-35.179 -2.159,-34.036 v1(-1.651,-34.036) ; v1@-2.286,-36.957 v1(-2.032,-36.957) -1.304,-37.685 -0.154,-37.685 0.32,-37.211 8.001,-37.211 10.287,-34.925 15.826,-34.925 18.722,-32.029 22.963,-32.029 23.647,-31.345 23.647,-27.382 24.797,-26.233 25.852,-26.233 26.862,-25.223 26.862,-24.93 28.359,-23.433 31.47,-23.433 33.769,-21.134 33.769,-17.641 35.484,-15.927 35.484,-11.013 36.526,-9.971 37.059,-9.438 37.059,14.582 36.652,14.988 36.652,18.212 35.992,18.872 35.992,19.417 35.293,20.117 34.304,20.117 34.214,20.117 33.528,19.431 33.528,17.78 K1.4@34.925,16.383
  Bottom Layer w0.254: v1@-2.286,-36.957 -2.032,-36.703 -2.032,-35.179 -1.651,-34.798 v1(-1.651,-34.036)
GEAR_B_6: R13.2 U3.23 | length 5.6
  Top Layer w0.254: R13.2 -8.509,-27.178 -6.858,-28.829 U3.23
GEAR_C_4: R14.2 U3.22 | length 5.8
  Top Layer w0.254: R14.2@-9.16,-25.146 -6.747,-27.559 U3.22
GEAR_D_2: R15.2 U3.24 | length 5.4
  Top Layer w0.254: R15.2 -7.874,-29.083 -6.858,-30.099 U3.24
GEAR_E_1: R16.2 U3.25 | length 5.1
  Top Layer w0.254: R16.2 -7.874,-30.988 -7.493,-31.369 U3.25
GEAR_F_9: R17.2 U3.26 | length 5
  Top Layer w0.254: R17.2 -7.493,-32.893 -7.239,-32.639 U3.26
GEAR_G_10: K1.5 R18.2 U3.27 | length 99.7
  Top Layer w0.254: R18.2 -7.874,-34.798 -6.985,-33.909 U3.27 -2.921,-33.909 -1.524,-32.512 v1(-1.524,-32.385) ; v1@-0.762,-37.084 v1(-0.508,-36.83) -0.381,-36.703 7.874,-36.703 10.16,-34.417 15.724,-34.417 18.543,-31.598 22.784,-31.598 23.216,-31.166 23.216,-27.203 24.618,-25.801 25.673,-25.801 26.43,-25.044 26.43,-24.751 28.18,-23.001 29.902,-23.001 30.371,-22.532 30.371,-21.12 31.59,-19.901 33.159,-19.901 33.337,-19.722 33.337,-17.462 35.052,-15.748 35.052,-10.795 35.091,-10.795 36.347,-9.539 36.526,-9.36 36.526,-7.658 36.576,-7.608 36.576,-4.33 36.526,-4.28 36.526,-2.578 36.576,-2.528 36.576,0.496 36.526,0.546 36.526,2.248 36.576,2.298 36.576,10.782 36.627,10.833 36.627,14.403 36.22,14.809 36.22,18.009 35.306,18.923 K1.5@34.925,18.923
  Bottom Layer w0.254: v1(-1.524,-32.385) -0.508,-33.401 -0.508,-33.867 -0.525,-33.884 -0.525,-36.813 v1(-0.508,-36.83) v1@-0.762,-37.084
GND: C1.2 C2.1 C3.1 C4.1 C5.1 K1.3 K2.3 K3.2 LED1.1 LED5.1 LED7.1 Q1.E R3.2 U1.2 U1.26 U2.2 U3.8 U3.19 | length 52.9
  Top Layer w0.254: v1@-7.874,-23.876 v1(-7.62,-23.876) -7.493,-23.749 U3.19 ; U1.26 -0.889,8.382 v1@0.064,9.335 ; U3.8 6.858,-26.289 ; v1(7.747,-27.178) 6.858,-26.289 ; C4.1@9.652,-26.781 9.652,-26.289 6.858,-26.289 ; C3.1 C4.1 ; C5.1 20.812,-26.654 K3.2 ; R3.2 31.623,-21.971 v1(32.766,-20.828) ; Q1.E 32.258,-18.567 v1(32.258,-16.383) 33.806,-16.383 34.62,-15.569 34.62,-10.616 35.671,-9.565 LED1.1 LED7.1 LED5.1
  Top Layer w1.016: v1(-7.62,-20.955) C2.1@-7.62,-19.177 ; U1.2 4.191,-10.795 v1(5.334,-11.938) v1(6.096,-12.7)
  other v1: 0,9.398
J1850_HD: K2.6 R2.1 | length 34.3
  Top Layer w0.254: K2.6 7.061,-37.643 8.18,-37.643 9.12,-36.703 9.144,-36.703 10.414,-35.433 15.929,-35.433 18.901,-32.461 23.142,-32.461 24.079,-31.524 24.079,-27.561 24.976,-26.665 26.675,-26.665 v1(26.924,-26.416) ; v1@23.749,-24.257 23.86,-24.368 R2.1
  Bottom Layer w0.254: v1@23.86,-24.368 24.876,-24.368 v1(26.924,-26.416)
  other v1: 23.495,-24.384
MCLR: K1.1 R11.1 U3.1 | length 102.4
  Top Layer w0.254: U3.1 6.731,-35.179 v1(7.112,-34.798) ; v1(11.033,-36.846) R11.1 ; v1(22.86,-33.401) 22.86,-33.354 24.511,-31.703 24.511,-27.74 25.154,-27.097 25.329,-27.271 27.278,-27.271 27.779,-26.77 27.779,-24.624 28.538,-23.864 31.649,-23.864 34.201,-21.313 34.201,-17.82 35.916,-16.106 35.916,-11.192 36.705,-10.402 37.49,-9.617 37.49,14.761 37.084,15.167 37.084,18.415 36.424,19.075 36.424,19.596 35.471,20.549 34.035,20.549 33.02,19.534 33.02,16.256 34.087,15.189 35.23,15.189 36.195,14.224 36.195,11.012 35.789,10.605 35.789,9.627 K1.1@34.925,8.763
  Bottom Layer w0.254: v1(7.112,-34.798) 7.112,-35.179 8.779,-36.846 v1(11.033,-36.846) 19.415,-36.846 v1(22.86,-33.401)
NetC1_1: C1.1 D1.K U2.1 | length 31.9
  Top Layer w1.016: U2.1 -9.031,-15.734 -9.031,-22.465 D1.K@-8.89,-22.606
  Bottom Layer w1.016: U2.1 -9.745,-12.92 -9.745,-4.314 -9.017,-3.586 C1.1
NetDS4_1: DS4.1 R16.1 | length 24
  Top Layer w0.254: DS4.1 -24.003,-15.24 -22.044,-15.24 -16.786,-20.498 -16.78,-20.498 -13.741,-23.536 -13.741,-28.589 -11.541,-30.789 R16.1@-11.541,-30.988
NetDS4_2: DS4.2 R15.1 | length 19.9
  Top Layer w0.254: DS4.2 -22.83,-13.843 -16.607,-20.066 -16.601,-20.066 -13.31,-23.357 -13.31,-27.115 -11.541,-28.884 R15.1@-11.541,-29.083
NetDS4_4: DS4.4 R14.1 | length 14.2
  Top Layer w0.254: DS4.4 -17.78,-17.672 -16.25,-19.202 -16.243,-19.202 -11.033,-24.413 R14.1@-11.033,-25.273
NetDS4_6: DS4.6 R13.1 | length 33.5
  Top Layer w0.254: DS4.6 -18.835,-2.198 -18.835,-17.228 -16.429,-19.634 -16.422,-19.634 -12.878,-23.178 -12.878,-25.73 -11.43,-27.178 R13.1@-11.033,-27.178
NetDS4_7: DS4.7 R7.1 | length 45.1
  Top Layer w0.254: DS4.7@-17.907,1.524 DS4.7 -16.732,1.397 -15.677,2.452 -14.803,2.452 -14.185,1.834 -14.185,-2.198 -11.9,-4.483 -11.9,-14.896 -10.287,-16.509 -10.287,-36.068 -10.922,-36.703 R7.1@-11.16,-36.703
NetDS4_9: DS4.9 R17.1 | length 43.9
  Top Layer w0.254: DS4.9 -22.86,-9.372 -26.455,-12.967 -26.455,-14.719 -25.502,-15.672 -22.223,-15.672 -16.965,-20.93 -16.959,-20.93 -14.173,-23.715 -14.173,-30.261 R17.1@-11.541,-32.893
NetDS4_10: DS4.10 R18.1 | length 45.5
  Top Layer w0.254: DS4.10 -25.4,-11.123 -26.887,-12.609 -26.887,-14.898 -25.681,-16.104 -22.402,-16.104 -17.144,-21.361 -17.137,-21.361 -14.681,-23.818 -14.681,-31.459 -11.342,-34.798 R18.1@-11.033,-34.798
NetLED1_2: LED1.2 R4.1 | length 41.7
  Top Layer w0.254: R4.1 9.527,-32.367 12.535,-32.367 13.152,-31.75 16.383,-31.75 16.383,-19.177 27.174,-8.386 33.548,-8.386 LED1.2
NetLED2_2: LED2.2 LED3.2 LED4.2 LED6.2 LED8.2 LED9.2 LED10.2 Q3.C | length 47.6
  Top Layer w1.016: LED10.2 -37.576,10.922 LED9.2 -38.465,6.35 LED8.2 -38.465,-2.921 LED6.2 -38.133,-3.253 -38.133,-4.109 -37.449,-4.793 LED4.2 -37.449,-11.938 LED3.2 -36.306,-15.866 -32.6,-19.572 -31.762,-19.572 -28.092,-23.241 Q3.C@-21.793,-23.241
NetLED5_2: LED5.2 R8.1 | length 37.3
  Top Layer w0.254: R8.1 10.525,-22.534 9.67,-21.679 9.67,-19.977 9.849,-19.798 14.365,-19.798 33.671,-0.492 LED5.2
NetLED7_2: LED7.2 R9.1 | length 30.4
  Top Layer w0.254: R9.1 14.097,-20.828 31.496,-3.429 LED7.2
NetQ1_B: Q1.B R2.2 R3.1 | length 8
  Top Layer w0.254: R2.2 28.829,-22.368 R3.1 27.661,-20.406 Q1.B
NetQ2_B: Q2.B R5.1 | length 3.3
  Top Layer w0.254: Q2.B -33.426,-4.69 R5.1
NetQ3_B: Q3.B R6.1 | length 49.2
  Top Layer w0.254: Q3.B -17.374,-25.552 -16.789,-26.137 -16.789,-35.535 -12.954,-39.37 -9.144,-39.37 -8.255,-40.259 -8.179,-40.183 -5.97,-40.183 -5.791,-40.004 -5.791,-37.922 -4.191,-36.322 -2.794,-36.322 -2.286,-35.814 0.381,-35.814 0.833,-36.266 7.676,-36.266 10.4,-33.542 11.4,-33.542 R6.1@11.43,-33.512
NetR4_2: R4.2 U3.3 | length 2.5
  Top Layer w0.254: U3.3 R4.2@7.382,-32.639
NetR5_2: R5.2 U3.6 | length 75.8
  Top Layer w0.254: v1(-32.639,-8.636) R5.2 ; v1(-27.559,-7.62) -27.432,-7.747 -27.432,-14.963 -25.758,-16.637 -22.479,-16.637 -17.323,-21.793 -17.316,-21.793 -15.164,-23.946 -15.164,-34.786 -12.217,-37.733 -8.001,-37.733 -6.102,-35.834 -2.941,-35.834 -2.413,-35.306 0.635,-35.306 1.163,-35.834 7.412,-35.834 8.382,-34.864 8.382,-30.79 7.036,-29.444 5.469,-29.444 U3.6
  Bottom Layer w0.254: v1@-32.639,-8.763 v1(-32.639,-8.636) -31.623,-7.62 v1(-27.559,-7.62)
NetR6_2: R6.2 U3.7 | length 8.2
  Top Layer w0.254: U3.7 6.135,-27.559 10.088,-31.512 R6.2@11.43,-31.512
NetR8_2: R8.2 U3.11 | length 3.9
  Top Layer w0.254: U3.11 8.017,-22.479 R8.2
NetR9_2: R9.2 U3.12 | length 3.8
  Top Layer w0.254: U3.12 8.144,-21.209 R9.2
NetR10_2: R10.2 U3.13 | length 5.8
  Top Layer w0.254: U3.13 6.62,-19.939 9.049,-17.51 R10.2
OSC1: C3.2 U3.9 X1.1 | length 18
  Top Layer w0.254: U3.9 10.104,-25.019 10.668,-25.583 10.668,-29.21 11.684,-30.226 14.705,-30.226 X1.1 14.859,-30.226 14.097,-29.464 13.319,-29.464 C3.2@12.176,-28.321
OSC2: C4.2 U3.10 X1.2 | length 13.7
  Top Layer w0.254: U3.10 6.985,-23.749 7.747,-24.511 13.87,-24.511 X1.2 12.965,-25.5 C4.2@12.176,-26.289
PETROL_1: LED11.1 U1.20 | length 22.7
  Top Layer w0.254: U1.20 v1(6.731,11.176) ; LED11.1 21.971,6.588 v1(21.971,8.382)
  Bottom Layer w0.254: v1(6.731,11.176) 7.544,11.176 8.636,10.084 12.879,10.084 14.835,8.128 21.717,8.128 v1(21.971,8.382)
PETROL_17: LED12.1 U1.3 | length 38.7
  Top Layer w0.254: U1.3 5.461,-10.541 6.809,-11.889 7.952,-11.889 8.509,-12.446 8.509,-16.256 8.763,-16.51 11.811,-16.51 13.208,-15.113 13.208,-9.247 15.773,-6.681 15.773,-1.372 16.891,-0.254 v1(18.923,-0.254) ; v1(18.923,2.413) 19.558,3.048 LED12.1
  Bottom Layer w0.254: v1(18.923,-0.254) v1(18.923,2.413)
PETROL_25: LED13.1 U1.37 | length 56.7
  Top Layer w0.254: v1@-8.636,-4.699 v1(-8.509,-4.826) U1.37 ; v1(14.097,-13.97) 14.097,-8.968 16.205,-6.86 16.205,-3.251 16.535,-2.921 19.852,-2.921 21.005,-4.074 21.005,-5.169 21.424,-5.588 22.352,-5.588 22.733,-5.207 22.733,-1.762 LED13.1
  Bottom Layer w0.254: v1(-8.509,-4.826) -8.509,-8.128 -2.667,-13.97 v1(14.097,-13.97)
PETROL_33: LED14.1 U1.28 | length 36.6
  Top Layer w0.203: 9.422,-2.921 13.081,-2.921 v1(13.335,-2.667)
  Top Layer w0.254: U1.28 -3.429,-1.27 v1(-2.667,-2.032) ; v1(3.683,-0.889) 7.39,-0.889 9.422,-2.921 ; v1(17.399,-2.032) 19.574,-2.032 LED14.1
  Bottom Layer w0.254: v1(-2.667,-2.032) 0.762,-2.032 1.905,-0.889 v1(3.683,-0.889) ; v1(13.335,-2.667) 15.875,-2.667 16.51,-2.032 v1(17.399,-2.032)
PETROL_34: LED15.1 U1.27 | length 40.5
  Top Layer w0.203: 9.271,-4.191 v1@12.7,-4.191
  Top Layer w0.254: v1(-2.286,-3.937) -1.812,-3.463 -1.812,-1.678 -2.159,-1.331 U1.27 ; v1(3.683,-2.667) 7.747,-2.667 9.271,-4.191 ; v1@12.7,-4.191 12.946,-4.191 12.954,-4.199 v1@12.954,-4.191 ; v1(17.653,-5.207) 19.05,-3.81 20.131,-3.81 20.573,-4.253 20.573,-5.348 21.86,-6.635 LED15.1
  Bottom Layer w0.254: v1(-2.286,-3.937) -0.508,-3.937 0.762,-2.667 3.302,-2.667 v1@3.683,-2.286 ; v1@13.208,-4.199 16.645,-4.199 v1(17.653,-5.207)
  other v1: 13.208,-4.191
RB0_PIC: Q1.C R1.2 U3.21 | length 55.8
  Top Layer w0.254: U3.21 -1.778,-26.289 -1.397,-25.908 v1(-1.397,-23.622) ; v1(17.399,-14.825) 17.399,-14.589 R1.2 ; v1(21.463,-15.367) 26.618,-15.367 29.844,-18.593 29.972,-18.593 Q1.C@29.972,-12.294
  Bottom Layer w0.254: v1(-1.397,-23.622) -1.397,-15.748 -1.219,-15.748 0.127,-14.402 13.32,-14.402 13.743,-14.825 v1(17.399,-14.825) 20.921,-14.825 v1(21.463,-15.367)
RX: K2.5 U3.18 | length 22.8
  Top Layer w0.254: U3.18 -1.016,-22.479 -0.178,-23.317 -0.178,-32.243 -0.601,-32.666 -0.601,-34.197 -0.381,-34.417 v1(0.762,-34.417)
  Bottom Layer w0.254: v1@1.016,-34.417 v1(0.762,-34.417) 0.762,-35.203 1.067,-35.508 1.067,-36.881 K2.5
SW1: K3.1 R12.1 U3.2 | length 33
  Top Layer w0.254: v1(2.286,-33.528) 2.667,-33.909 U3.2 ; v1(14.224,-32.766) 16.129,-32.766 18.923,-29.972 K3.1 ; R12.1 21.066,-33.671 v1@21.336,-33.401
  Bottom Layer w0.254: v1(2.286,-33.528) 2.794,-33.02 13.97,-33.02 v1(14.224,-32.766) 15.129,-33.671 v1@21.066,-33.671 ; v1@2.413,-33.909 v1@2.413,-33.655
  other v1: 21.336,-33.655
TX: K2.4 U3.17 | length 22.8
  Top Layer w0.254: U3.17 -0.254,-21.209 0.381,-21.844 v1(0.381,-32.893)
  Bottom Layer w0.254: v1@0.381,-33.02 v1(0.381,-32.893) -0.076,-33.35 -0.076,-34.046 -0.093,-34.063 -0.093,-34.959 0.635,-35.687 K2.4
VCC: D1.A K2.1 | length 25.3
  Top Layer w1.016: D1.A@-19.05,-22.606 -17.653,-22.606 -15.977,-24.282 -15.977,-35.123 -12.542,-38.557 -7.079,-38.557 K2.1@-6.816,-38.82
pads on no net: DS0.5 DS2.5 DS3.5 DS4.5 U1.1 U1.12 U1.23 U1.34 U3.14 U3.15 U3.16

## Polygon pours and split planes (outlines as drawn)
GND on Bottom Layer "Top Layer-No Net" (solid, pour order 4): -41.5,0 ccw(c0,0) 0,-41.5 ccw(c0,0) 41.5,0 ccw(c0,0) 0,41.5 ccw(c0,0)

## Keep-outs
Keep-Out Layer:
  circle w0.254: c-40,40 r1.5
  circle w0.254: c40,40 r1.5
  circle w0.254: c-40,-40 r1.5
  circle w0.254: c40,-40 r1.5
  lines w0.254: -50,-50 -50,50 50,50 50,-50
  lines w2: -36.89,-23.051 cw(c0,0) -32.327,29.107 ; -34.278,-26.781 ccw(c0,0) 29.107,-32.327 ; -29.107,32.327 cw(c0,0) 29.107,32.327 ; 32.327,-29.107 ccw(c0,0) 32.327,29.107

## Silkscreen, mask and mechanical layers (free items; w line width, h text height)
Top Overlay:
  drawing of 1007 lines, arcs and shapes, not listed
  text "Xavier Morales" at -5.588,36.83 h1.52
  text "Dec 2014" at -5.588,34.544 h1.52
  text "PICKIT3" at 32.258,12.7 h1.52 r90
  text "6000" at -39.497,10.16 h1.27
  text "5000" at -40.767,5.08 h1.27
  text "RPM" at 29.845,2.794 h2.54
  text "4000" at -41.148,-0.127 h1.27
  text "L/100" at 29.845,-1.778 h2.54
  text "3000" at -40.894,-5.207 h1.27
  text "Temp" at 29.845,-6.604 h2.54
  text "2000" at -39.624,-10.287 h1.27
  text "1000" at -38.1,-15.367 h1.27
  text "idle" at -35.814,-20.32 h1.27
  text "SW" at 19.431,-29.845 h1.52 r90
Bottom Overlay:
  rectangle: -14.859,33.528 -3.302,38.608
  rectangle: 3.048,33.655 14.605,38.735
  text "REV" at 19.431,34.163 h1.52
  text "S/N" at 1.524,34.036 h1.52
  text "12V" at -5.715,-37.465 h1.02
  text "TX" at 2.159,-37.465 h1.02
  text "RX" at 4.445,-37.465 h1.02
  text "J1850" at 11.938,-39.751 h1.02
  text "5V" at -3.81,-41.529 h1.02
  text "GND" at -0.381,-41.529 h1.02
Mechanical 1:
  lines w0.254: -50,-50 50,-50
Mechanical 15:
  circle w0.254: c0,0 r42.5

## Text inside footprints (layer, text, board x,y; h text height)
U2: Bottom Overlay "3" at -6.215,-10.145 h1.5 r180; Bottom Overlay "1" at -11.045,-10.145 h1.5 r180; Bottom Overlay "2" at -8.755,-10.145 h1.5 r180